# Altium PCB Mainboard BLE_cube.PcbDoc
Units mil, origin at the board's own origin, x right, y up, seen from the top; angles counter-clockwise.
Board outline 1968.5 x 1968.5 mil, 2 copper layers (Top Layer, Bottom Layer); 66 components, 119 nets, 314 pads, 270 vias.
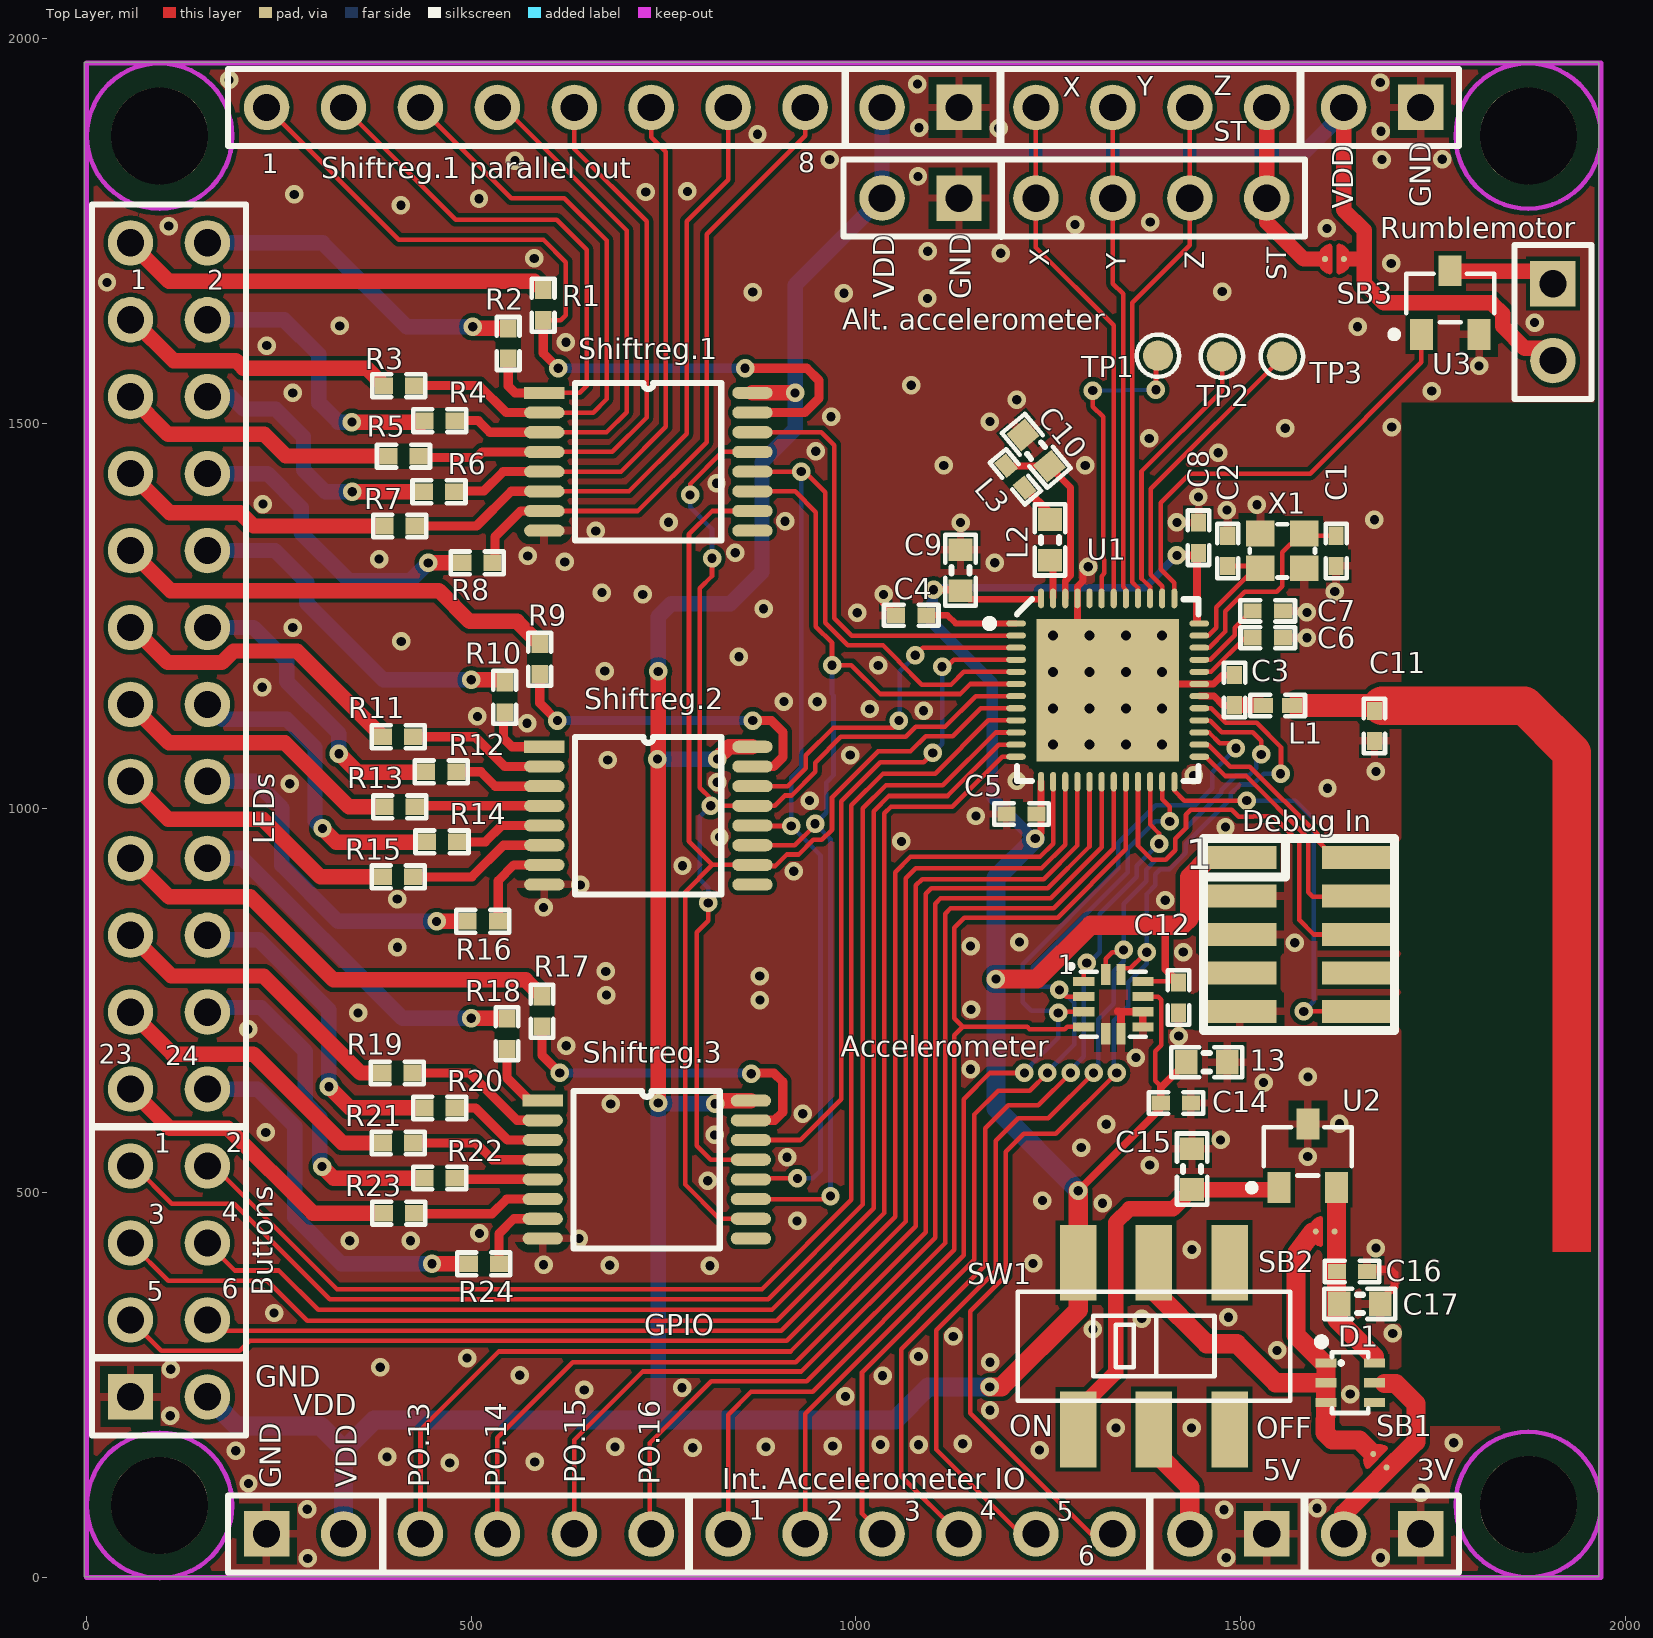
[diagram p0: Top Layer view]
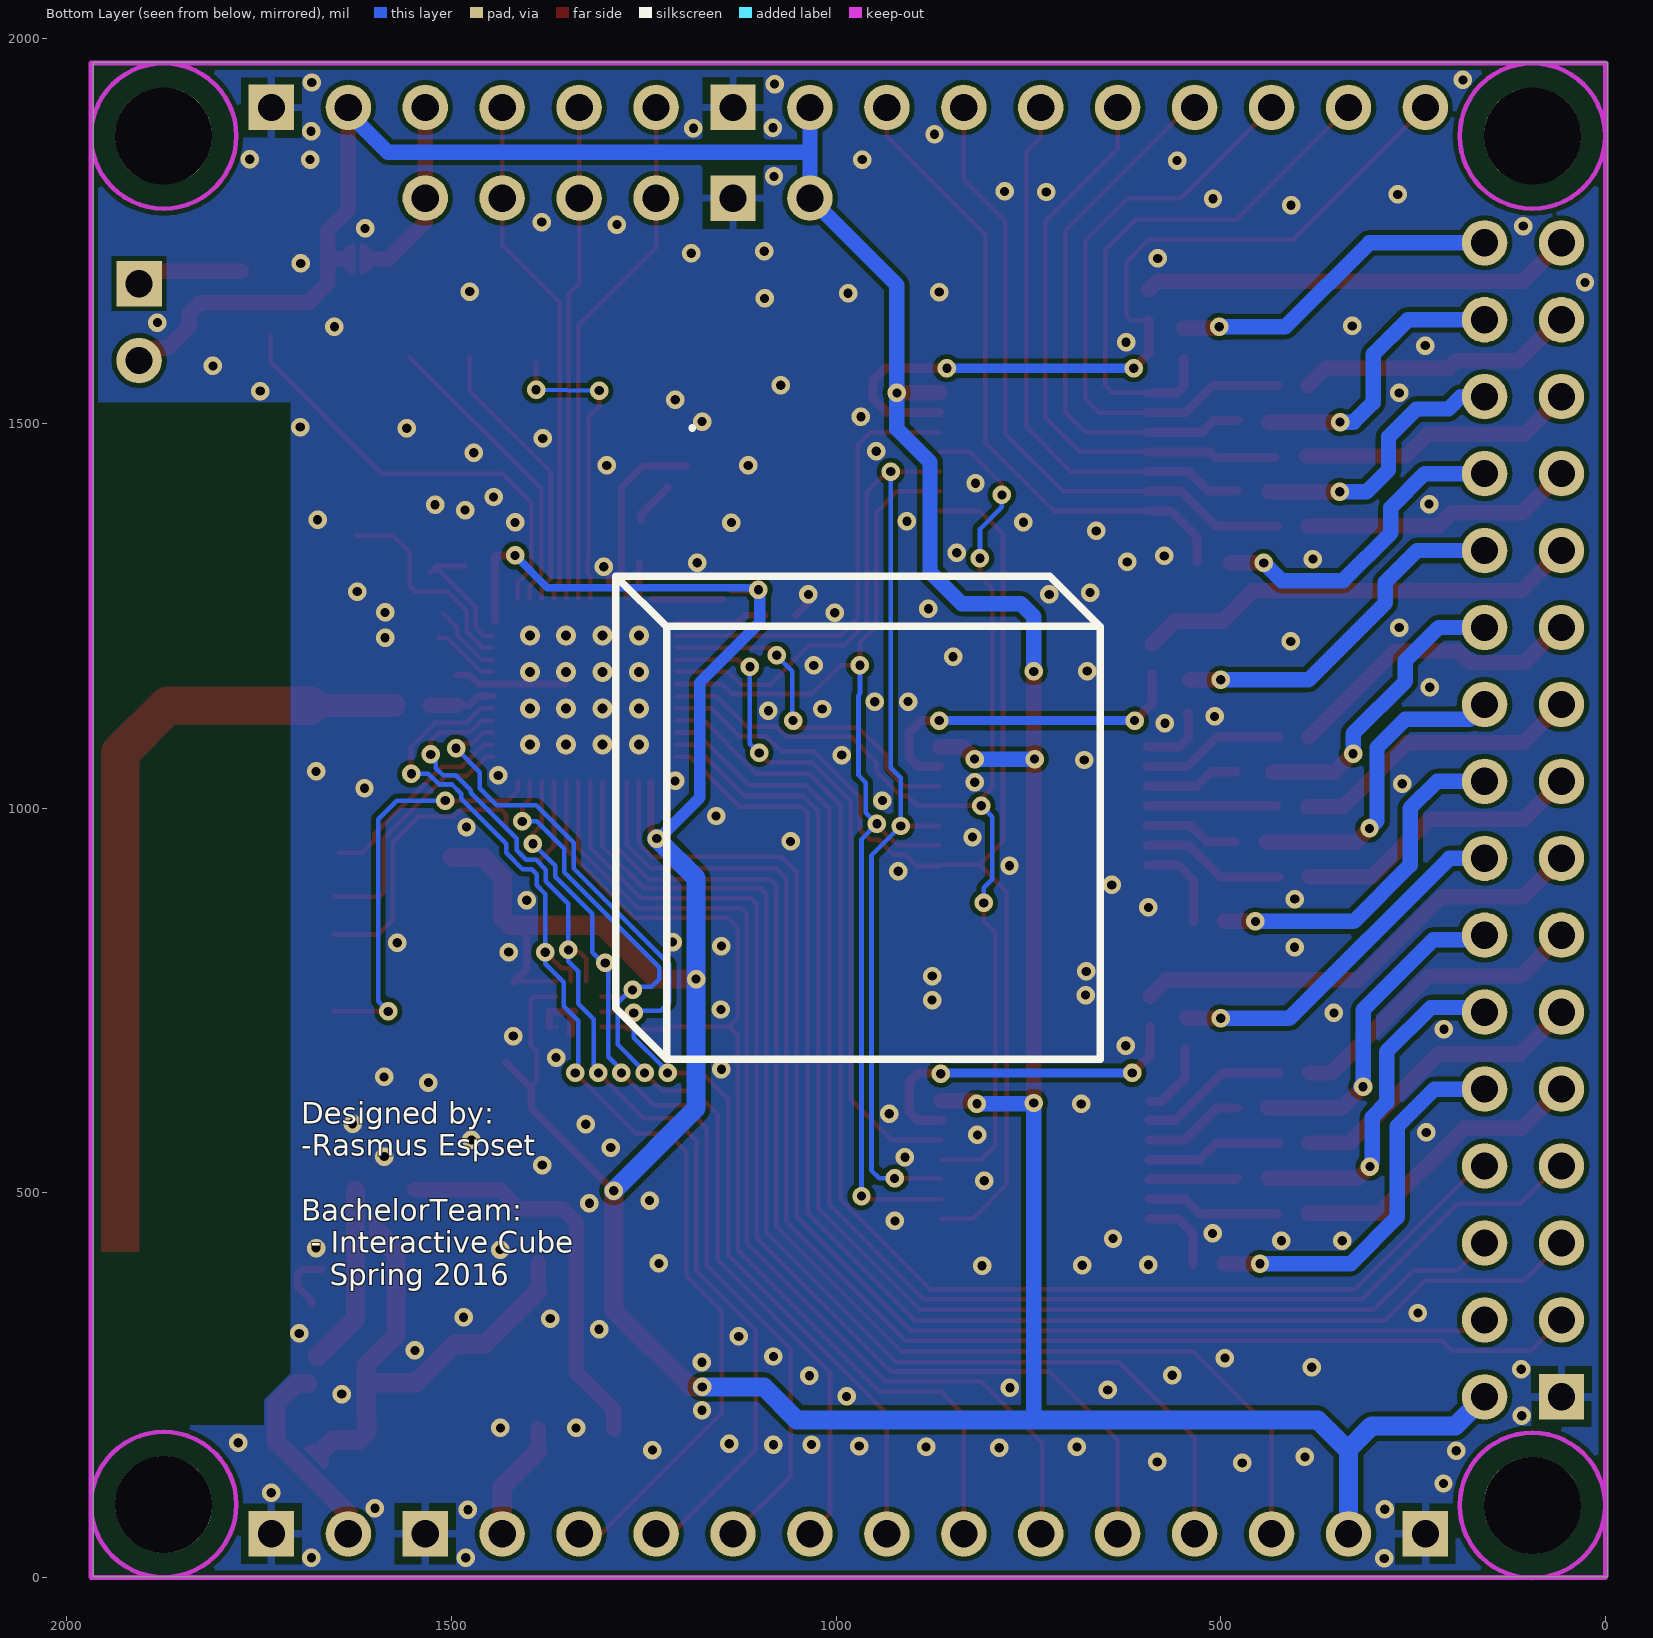
[diagram p1: Bottom Layer view, seen from below]
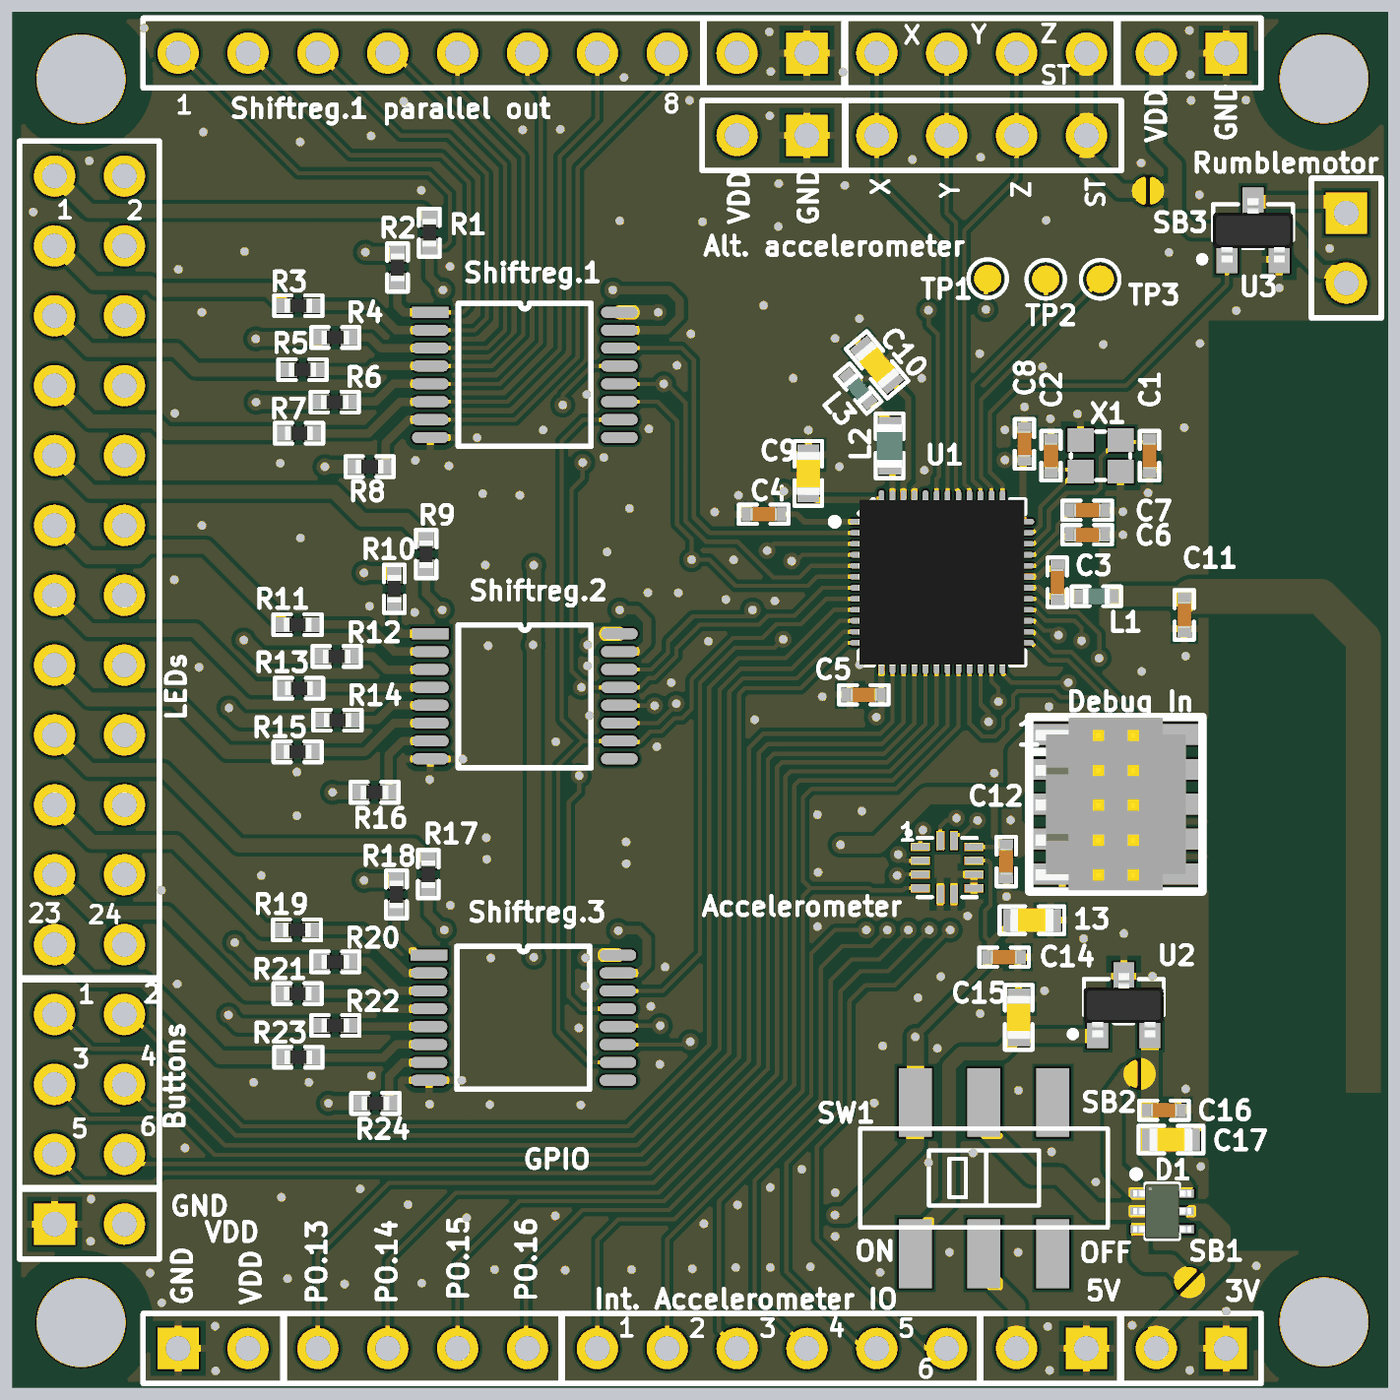
[diagram p2: 3D render of the assembled board from above, using the file's embedded part models]

## Layer stack, top to bottom
Top Solder: solder mask 0.4, Solder Resist, Dk 3.5
Top Layer: signal copper 1.4
Dielectric 1: dielectric 12.6, FR-4, Dk 4.8
Bottom Layer: signal copper 1.4
Bottom Solder: solder mask 0.4, Solder Resist, Dk 3.5

## Board outline
-3,1 1965.5,1 1965.5,1969.5 -3,1969.5

## Design rules (kind name [scope] priority, off if disabled: settings)
Clearance SB_Clearance [HasFootprint('Solderbridge')] p1: gap=5
Clearance [All] p2: gap=6
HoleSize [All] p1: absolutevalues=TRUE maxlimit=200 minlimit=1 maxpercent=80.000 minpercent=20.000
MinimumSolderMaskSliver [All] p1: minsoldermaskwidth=1
PolygonConnect [IsVia] p1: connectstyle=Direct reliefconductorwidth=10 reliefentries=4 polygonreliefangle="90 Angle" airgapwidth=10
PolygonConnect PolygonConnect_1 [All] p2: connectstyle=Relief reliefconductorwidth=10 reliefentries=4 polygonreliefangle="90 Angle" airgapwidth=10
RoutingVias [All] p1: holewidth=28 width=50 viastyle="Through Hole" minholewidth=12 minwidth=24 maxholewidth=28 maxwidth=50
SilkToSilkClearance [All] p1: silktosilkclearance=6
SolderMaskExpansion [All] p1: expansion=3
Width [All] p1: maxlimit=1000 minlimit=6 preferedwidth=10
27 further rules are at their usual default settings.

## Classes and differential pairs
component class Sheet2: * Accelerometer C1 C2 C3 C5 C6 C7 C8 C9 C10 C11 "Debug In" GPIO L1 L2 L3 LEDs P? R1 R2 R3 R4 R5 R6 R7 R8 R9 R10 R11 R12 R13 R14 R15 R16 R17 R18 R19 R20 R21 R22 R23 R24 R? Rumblemotor Shiftreg.1 skiftreg2 skiftreg3 U2 U3 VDD X1

## Components (designator, comment, footprint, x,y, rotation, side; value= is the part's Value field where it differs from the comment)
13 "10µF" CAPC1608X06L 1456,669.75 r0 top (schematic designator C13)
Accelerometer "LIS2DH12" LGA50P200X200X100-12N 1334.65,745.17 r0 top (schematic designator U4)
"Alt. accelerometer" "Comment" HDR1X6 1034,1792.86 r0 top (schematic designator P5)
C1 "12pF" CAPC1005X04L 1624.26,1334.41 r270 top
C2 "12pF" CAPC1005X04L 1483.26,1334.41 r90 top
C3 "0.8pF" CAPC1005X04L 1492.26,1153.41 r270 top
C4 "100nF" CAPC1005X04L 1072,1250.75 r180 top
C5 "100nF" CAPC1005X04L 1215.26,992.41 r180 top
C6 "N.C." CAPC1005X04L 1535.26,1221.41 r180 top
C7 "100pF" CAPC1005X04L 1535.26,1256.41 r0 top
C8 "100nF" CAPC1005X04L 1445.26,1351.41 r90 top
C9 "4.7µF" CAPC1608X06L 1136,1309.17 r90 top
C10 "1.0µF" CAPC1608X06L 1234.29,1464.61 r310 top
C11 "1pF" CAPC1005X04L 1674,1106.75 r90 top
C12 "100nF" CAPC1005X04L 1419.29,753.75 r90 top
C14 "100nF" CAPC1005X04L 1416,616.75 r180 top
C15 "1.0µF" CAPC1608X06L 1437,530.75 r90 top
C16 "100nF" CAPC1005X04L 1645,397.66 r180 top
C17 "1.0µF" CAPC1608X06L 1655,355.66 r180 top
D1 "SD103ATW-7-F" SOT-363 1611,278.75 r270 top
"Debug In" "FTSH-105" FTSH-105-K 1576,835.75 r270 top
GPIO "Header 16" HDR1X16#1 1734,56.75 r180 top (schematic designator P3)
L1 "3.9nH" INDC1005X04L 1548.26,1133.41 r0 top
L2 "10µH" INDC1608X06L 1252.26,1348.61 r270 top
L3 "15nH" INDC1005X04L 1207.29,1430.61 r310 top
LEDs "Header 16X2" HDR2X16 57.12,1734.8 r270 top (schematic designator P2)
R1 "N.C." RESC1005X04L 593.54,1653.75 r270 top
R2 "N.C." RESC1005X04L 548,1603.94 r270 top
R3 "N.C." RESC1005X04L 406,1549.21 r0 top
R4 "N.C." RESC1005X04L 459,1503.67 r0 top
R5 "N.C." RESC1005X04L 412,1457.59 r0 top
R6 "N.C." RESC1005X04L 458.12,1411.25 r0 top
R7 "N.C." RESC1005X04L 407,1366.67 r0 top
R8 "N.C." RESC1005X04L 508,1318.85 r0 top
R9 "N.C." RESC1005X04L 589,1193.75 r270 top
R10 "N.C." RESC1005X04L 543.46,1143.94 r270 top
R11 "N.C." RESC1005X04L 405,1092.75 r0 top
R12 "N.C." RESC1005X04L 461,1047.21 r0 top
R13 "N.C." RESC1005X04L 407,1001.67 r0 top
R14 "N.C." RESC1005X04L 462,956.14 r0 top
R15 "N.C." RESC1005X04L 405,910.6 r0 top
R16 "N.C." RESC1005X04L 515,852.75 r0 top
R17 "N.C." RESC1005X04L 592,735.75 r270 top
R18 "N.C." RESC1005X04L 546.46,706.75 r270 top
R19 "N.C." RESC1005X04L 404,655.75 r0 top
R20 "N.C." RESC1005X04L 459,610.21 r0 top
R21 "N.C." RESC1005X04L 405,564.67 r0 top
R22 "N.C." RESC1005X04L 459,519.14 r0 top
R23 "N.C." RESC1005X04L 406,473.6 r0 top
R24 "N.C." RESC1005X04L 516.36,407.65 r0 top
Rumblemotor "Header 2" HDR1X2 1906,1581.75 r90 top (schematic designator P4)
SB1 "Solderbridge" Solderbridge 1672.4,160.55 r315 top
SB2 "Solderbridge" Solderbridge 1622.32,449.79 r180 top
SB3 "Solderbridge" Solderbridge 1634.28,1713.71 r180 top
Shiftreg.1 "TSSOP16" SOP16 595,1539.75 r0 top (schematic designator Skiftreg.1)
Shiftreg.2 "TSSOP16" SOP16 595,1079.75 r0 top (schematic designator skiftreg.2)
Shiftreg.3 "TSSOP16" SOP16 593,619.75 r0 top (schematic designator shiftreg.3)
SW1 "Switch" JS202011SCQN 1387.36,300.75 r180 top
TP1 "Ø1.0mm,SMD" TP_SMD_Ø1.0mm 1392.7,1588.05 r0 top (schematic designator TP9)
TP2 "Ø1.0mm,SMD" TP_SMD_Ø1.0mm 1475.7,1587.05 r0 top (schematic designator TP9)
TP3 "Ø1.0mm,SMD" TP_SMD_Ø1.0mm 1553.7,1587.05 r0 top (schematic designator TP9)
U1 "nRF52832-QFAA" QFN40P600X600X90-48N 1327.26,1153.41 r0 top locked
U2 "AP7333-33SAG-7" SOT-23A 1550,506.75 r0 top
U3 "2N7000-Transistor" SOT-23A 1735,1615.75 r0 top
VDD "Header 16" HDR1X16#2 234,1910.75 r0 top (schematic designator P1)
X1 "32MHz" BT-XTAL_2016 1554.26,1334.41 r180 top

## Footprints (in the part's own frame and the unit in brackets; to place one, negate y for a bottom-side part, rotate by r counter-clockwise, add the part's x,y. Pads: shape width x height; smd on the part's side, far side on the other; paste and mask are expansions set on the pad)
BT-XTAL_2016 [mm] "Crystal 2.0 x 1.6 mm"
  rect 0.95x0.85 smd: 1(-0.725,-0.575) 2(0.725,-0.575) 3(0.725,0.575) 4(-0.725,0.575)
  silkscreen extent -1.08,-0.88 1.08,0.88
CAPC1005X04L [mm] "Chip Capacitor, 2-Leads, Body 1.0x0.5mm, IPC High Density"
  rect 0.6x0.5 smd: 1(-0.5,0) 2(0.5,0)
  silkscreen extent -0.9,-0.35 0.9,0.35, body extent -0.51,-0.25 0.51,0.25, height 0.5
CAPC1608X06L [mm] "Chip Capacitor, 2-Leads, Body 1.6x0.8mm, IPC High Density"
  rect 0.75x0.8 smd: 1(-0.675,0) 2(0.675,0)
  silkscreen extent -1.17,-0.5 1.17,0.5, body extent -0.8,-0.43 0.8,0.43, height 0.8
FTSH-105-K [mm]
  rect 0.76x2.4 smd: 1(-2.54,-1.95) 2(-2.54,1.95) 3(-1.27,-1.95) 4(-1.27,1.95) 5(0,-1.95) 6(0,1.95) 7(1.27,-1.95) 8(1.27,1.95) 9(2.54,-1.95) 10(2.54,1.95)
  silkscreen extent -3.18,-3.15 3.18,3.15, body extent -3.14,-2.92 3.14,2.92, height 5.71
HDR1X2 [mm] "Connector; Header; 2 Position"
  round 1.5 hole 0.9: 1(0,0)
  rect 1.5x1.5 hole 0.9: 2(2.54,0)
  silkscreen extent -1.27,-1.27 3.81,1.27
HDR1X6 [mm] "Connector; Header; 6 Position"
  round 1.5 hole 0.9: 1(0,0) 3(5.08,0) 4(7.62,0) 5(10.16,0) 6(12.7,0)
  rect 1.5x1.5 hole 0.9: 2(2.54,0)
  silkscreen extent -1.27,-1.27 13.97,1.27
HDR1X16#1 [mm] "Connector; Header; 16 Position"
  rect 1.5x1.5 hole 0.9: 1(0,0) 3(5.08,0) 16(38.1,0)
  round 1.5 hole 0.9: 2(2.54,0) 4(7.62,0) 5(10.16,0) 6(12.7,0) 7(15.24,0) 8(17.78,0) 9(20.32,0) 10(22.86,0) 11(25.4,0) 12(27.94,0) 13(30.48,0) 14(33.02,0) 15(35.56,0)
  silkscreen extent -1.27,-1.27 39.37,1.27
HDR1X16#2 [mm] "Connector; Header; 16 Position"
  round 1.5 hole 0.9: 1(0,0) 2(2.54,0) 3(5.08,0) 4(7.62,0) 5(10.16,0) 6(12.7,0) 7(15.24,0) 8(17.78,0) 9(20.32,0) 11(25.4,0) 12(27.94,0) 13(30.48,0) 14(33.02,0) 15(35.56,0)
  rect 1.5x1.5 hole 0.9: 10(22.86,0) 16(38.1,0)
  silkscreen extent -1.27,-1.27 39.37,1.27
HDR2X16 [mm] "Connector; Header; 16x2 Position"
  round 1.5 hole 0.9: 1(0,0) 2(0,2.54) 3(2.54,0) 4(2.54,2.54) 5(5.08,0) 6(5.08,2.54) 7(7.62,0) 8(7.62,2.54) 9(10.16,0) 10(10.16,2.54) 11(12.7,0) 12(12.7,2.54) 13(15.24,0) 14(15.24,2.54) 15(17.78,0) 16(17.78,2.54) 17(20.32,0) 18(20.32,2.54) 19(22.86,0) 20(22.86,2.54) 21(25.4,0) 22(25.4,2.54) 23(27.94,0) 24(27.94,2.54) 25(30.48,0) 26(30.48,2.54) 27(33.02,0) 28(33.02,2.54) 29(35.56,0) 30(35.56,2.54) 32(38.1,2.54)
  rect 1.5x1.5 hole 0.9: 31(38.1,0)
  silkscreen extent -1.27,-1.27 39.37,3.81
INDC1005X04L [mm] "Chip Inductor, 2-Leads, Body 1.0x0.5mm, IPC High Density"
  rect 0.65x0.5 smd: 1(-0.475,0) 2(0.475,0)
  silkscreen extent -0.9,-0.35 0.9,0.35, body extent -0.5,-0.3 0.5,0.3, height 0.5
INDC1608X06L [mm] "Chip Inductor, 2-Leads, Body 1.6x0.8mm, IPC High Density"
  rect 0.75x0.8 smd: 1(-0.675,0) 2(0.675,0)
  silkscreen extent -1.18,-0.5 1.17,0.5, body extent -0.8,-0.48 0.8,0.48, height 0.8
JS202011SCQN [mm]
  rect 1.2x2.5 smd: 1(-2.5,-2.75) 2(0,-2.75) 3(2.5,-2.75) 4(-2.5,2.75) 5(0,2.75) 6(2.5,2.75)
  silkscreen extent -4.5,-1.8 4.5,1.8, body extent -4.52,-3.75 4.52,3.75, height 5.5
LGA50P200X200X100-12N [mm] "LGA, 12-Leads, Body 2.00x2.00mm, Pitch 0.50mm, IPC Medium Density"
  rect 0.7x0.3 smd paste-0.025 mask+0.05: 1(-0.975,0.75) 2(-0.975,0.25) 3(-0.975,-0.25) 4(-0.975,-0.75) 7(0.975,-0.75) 8(0.975,-0.25) 9(0.975,0.25) 10(0.975,0.75)
  rect 0.3x0.7 smd paste-0.025 mask+0.05: 5(-0.25,-0.975) 6(0.25,-0.975) 11(0.25,0.975) 12(-0.25,0.975)
  silkscreen extent -1.45,-1.07 1.08,1.3, body extent -1,-1 1,1, height 1.01
QFN40P600X600X90-48N [mm] "QFN, 48-Leads, Body 6,0x6,0mm (max), Pitch 0,40mm, IPC Medium Density"
  oval 0.65x0.2 smd: 1(-3.025,2.2) 2(-3.025,1.8) 3(-3.025,1.4) 4(-3.025,1) 5(-3.025,0.6) 6(-3.025,0.2) 7(-3.025,-0.2) 8(-3.025,-0.6) 9(-3.025,-1) 10(-3.025,-1.4) 11(-3.025,-1.8) 12(-3.025,-2.2) 25(3.025,-2.2) 26(3.025,-1.8) 27(3.025,-1.4) 28(3.025,-1) 29(3.025,-0.6) 30(3.025,-0.2) 31(3.025,0.2) 32(3.025,0.6) 33(3.025,1) 34(3.025,1.4) 35(3.025,1.8) 36(3.025,2.2)
  oval 0.2x0.65 smd: 13(-2.2,-3.025) 14(-1.8,-3.025) 15(-1.4,-3.025) 16(-1,-3.025) 17(-0.6,-3.025) 18(-0.2,-3.025) 19(0.2,-3.025) 20(0.6,-3.025) 21(1,-3.025) 22(1.4,-3.025) 23(1.8,-3.025) 24(2.2,-3.025) 37(2.2,3.025) 38(1.8,3.025) 39(1.4,3.025) 40(1,3.025) 41(0.6,3.025) 42(0.2,3.025) 43(-0.2,3.025) 44(-0.6,3.025) 45(-1,3.025) 46(-1.4,3.025) 47(-1.8,3.025) 48(-2.2,3.025)
  rect 4.7x4.7 smd: 49(0,0)
  silkscreen extent -4.02,-3 3,3, body extent -3.02,-3.02 3.02,3.02, height 0.86
RESC1005X04L [mm]
  rect 0.6x0.55 smd: 1(-0.5,0) 2(0.5,0)
  silkscreen extent -0.87,-0.38 0.88,0.38, body extent -0.5,-0.25 0.5,0.25, height 0.3
Solderbridge [mm]
  round 0.2 smd paste-10: 1(0,0) 2(0.625,0)
  Top Layer region: 0.236,-0.432 0.16,-0.505 0.042,-0.467 -0.023,-0.424 -0.097,-0.351 -0.15,-0.292 -0.208,-0.193 -0.236,-0.099 -0.231,0.122 -0.206,0.193 -0.122,0.33 -0.038,0.411 0.054,0.469 0.155,0.5 0.206,0.483 0.236,0.43
  Top Layer region: 0.389,0.432 0.465,0.505 0.583,0.467 0.648,0.424 0.721,0.351 0.775,0.292 0.833,0.193 0.861,0.099 0.856,-0.122 0.831,-0.193 0.747,-0.33 0.663,-0.411 0.571,-0.469 0.47,-0.5 0.419,-0.483 0.389,-0.43
  Top Layer lines w0.152: 0.159,-0.431 cw(c0.27,0) 0.159,0.431 ; 0.465,-0.431 ccw(c0.355,0) 0.465,0.431
SOP16 [mm]
  rect 1.33x0.4 smd: 1(0,0)
  oval 1.33x0.4 smd: 2(0,-0.65) 3(0,-1.3) 4(0,-1.95) 5(0,-2.6) 6(0,-3.25) 7(0,-3.9) 8(0,-4.55) 9(6.87,-4.55) 10(6.87,-3.9) 11(6.87,-3.25) 12(6.87,-2.6) 13(6.87,-1.95) 14(6.87,-1.3) 15(6.87,-0.65) 16(6.87,0)
  silkscreen extent 1.02,-4.88 5.84,0.33, body extent 0.92,-4.98 5.94,0.43, height 1.3
SOT-23A [mil] "SOT-23 footprint"
  rect 30x40 smd: 1(0,0) 2(74.8,0) 3(37.4,82.68)
  silkscreen extent -39,-4 94,79, body extent -20,-5 95,87, height 39
SOT-363 [mm] "SOT-363 (SC88)"
  rect 0.3x0.7 smd: 1(0,0) 2(0.65,0) 3(1.3,0) 4(1.3,1.6) 5(0.65,1.6) 6(0,1.6)
  silkscreen extent -0.82,-0.27 1.65,1.4, body extent -0.35,-0.25 1.65,1.85, height 0.93
TP_SMD_Ø1.0mm [mm]
  round 1 smd paste-5: 1(0,0)
  silkscreen extent -0.7,-0.7 0.7,0.7

## Part data
13: library part C0603-10µ, "Capacitor, X5R, ±20%"
"Alt. accelerometer": library part "Header 6"
C1 C2: library part C0402-12p, "Capacitor, NP0, ±2%"
C3: library part C0402-0.8p, "Capacitor, NP0, ±5%"
C4 C5 C8 C12 C14 C16: library part C0402-100n, "Capacitor, X7R, ±10%"
C6: library part C0402-N.C., "Not mounted"
C7: library part C0402-100p, "Capacitor, NP0, ±5%"
C9: library part C0603-4µ7, "Capacitor, X5R, ±10%"
C10 C15 C17: library part C0603-1µ0, "Capacitor, X7R, ±10%"
C11: "Capacitor, NP0, ±0.1pF"
D1: "Surface Mount Schottky Barrier Diode Array"
"Debug In": library part FTSH-105-01-F-DV-K, "SAMTEC - CONN HEADER 10POS DUAL .05\" SMD KEYING SHROUD"
GPIO VDD: "Header, 16-Pin"
L1: library part L0402-3n9, "High frequency chip inductor ±5%"
L2: library part L0603-10µ, "Chip inductor, IDC,min = 50 mA, ±20%"
L3: library part L0402-15n, "High frequency chip inductor ±10%"
LEDs: "Header, 16-Pin, Dual row"
R1 R2 R3 R4 R5 R6 R7 R8 R9 R10 R11 R12 R13 R14 R15 R16 R17 R18 R19 R20 R21 R22 R23 R24: library part RES_0402, "Not mounted"
Rumblemotor: "Header, 2-Pin"
Shiftreg.1 Shiftreg.2 Shiftreg.3: "Shiftregister, 74HC595"
SW1: library part SW-DPDT, "SMD slide Switch (ON-ON)"
TP1 TP2 TP3: library part TP_SMD_Ø1.0MM, "1.0mm circular SMD testpad"
U1: "Multi-protocol Bluetooth Low Energy and 2.4GHz proprietary system-on-chip"
U2: "300mA, Low Quiescent Current, Fast Transient Low Dropout Linear Regulator"
X1: library part XTAL_SMD2016_32MHz_8pF_Epson, "XTAL SMD 2016, 32MHz, Cl=8pF, Total Tol: ±40ppm"

## Free pads (board coordinates)
  round 126 hole 126: 1(95,93.75) 1(95,1873.75) 1(1874,94.75) 1(1874,1873.75)

## Via types
v1: diameter 24, hole 12, Top Layer to Bottom Layer, tented both sides, 254 vias
v2: diameter 25.98, hole 12.99, Top Layer to Bottom Layer, tented both sides, 16 vias

## Nets (pads, with @x,y where several pads share a name; then routed paths per layer and width w, separated by ;. In a path a pad name is that pad's centre, name@x,y a point inside that pad or via, vN(x,y) a via of type N, cw(c..) or ccw(c..) an arc to the next point about the centre after c; other vN are vias at no path point)
3VExt: D1.5 GPIO.2 SB1.2 | length 258.7
  Top Layer w25: GPIO.2 1634,82.75 1727.6,176.35 ; D1.5@1687.52,251.97 1701.77,251.97 1728,225.75 1728,176.75
3VInt: D1.1 D1.2 D1.3 SB1.1 SB2.2 SW1.2 | length 707.4
  Top Layer w12: D1.3 1611,235.75
  Top Layer w20: SW1.2@1387.36,372.38 SW1.2
  Top Layer w25: SW1.2@1387.36,372.38 1456,303.75 1495,303.75 1545.59,253.16 D1.2 ; 1572,398.75 1572,419.75 ; 1593.66,449.17 1572,419.75 ; 1611,235.75 D1.2 ; 1667.3,165.65 1654.21,178.75 1619,178.75 1610,187.75 1610.61,227.57 D1.2 ; 1572,419.75 1572,314.75 1611,275.75 D1.2
5V->3V: C16.2 C17.2 D1.6 SB2.1 U2.2 | length 236.3
  Top Layer w25: U2.2@1624.8,502.75 1624.8,335.95 1673.97,286.78
5VExt: GPIO.4 SW1.5 | length 155
  Top Layer w20: SW1.5@1387.36,164.38 SW1.5
  Top Layer w25: SW1.5@1387.36,164.38 1434,117.75 GPIO.4
5VInt: C15.1 SW1.6 U2.1 | length 516.7
  Top Layer w20: SW1.6 1288.94,217.69 1337.6,266.35 1337.6,461.35 1355.33,479.08 1412.19,479.08 C15.1 U2.1@1547.43,504.17
"Aks. CS": Accelerometer.2 GPIO.8 U1.23 | length 1301.8
  Top Layer w6: GPIO.8 1008,82.75 1008,266.75 1154,412.75 1154,601.75 1185,632.75 1226,632.75 v1(1249,655.75) v1@1249,646.75 ; v1(1264.6,763.75) 1273.33,755.02 Accelerometer.2 ; Accelerometer.2@1296.58,755.06 Accelerometer.2@1305,755.06 ; U1.23 1398.13,1011.62 1408,1001.75 v1(1408,982.75)
  Bottom Layer w6: v1@1256,664.75 1284,692.75 1284,747.05 v1@1263.3,767.75 ; v1@1272.6,767.75 v1@1263.3,767.75 ; v1(1408,982.75) 1389,982.75 1353.2,946.95 1353.2,916.55 1229.99,793.33 1229.99,777.76 1240,767.75 v1@1263.3,767.75
"Aks. INT1": Accelerometer.12 GPIO.6 U1.28 | length 1450.9
  Top Layer w6: GPIO.6 1214,56.75 1104.4,166.35 1104.4,321.15 1182,398.75 1182,567.75 1211,596.75 1250,596.75 v1(1309,655.75) v1@1308.7,655.75 ; Accelerometer.12 1324.81,804.33 1333.22,812.75 v1@1348,812.75 ; Accelerometer.12@1325,774.75 Accelerometer.12@1325,783.56 ; U1.28@1446.35,1113.51 1460.74,1113.51 1475.5,1098.75 1516,1098.75 1527,1087.75 v1(1527,1069.75)
  Bottom Layer w6: v1@1315,661.75 1315,725.75 1335,745.75 1335,787.75 1348,800.75 v1(1348,815.75) 1348,875.75 1377.2,904.95 1377.2,919.98 1389.97,932.75 1402.7,932.75 1415,945.05 1415,960.05 1475,1020.05 1475,1023.42 1494.33,1042.75 1511,1042.75 1520.15,1051.9 1520.15,1062.9 v1(1527,1069.75)
"Aks. INT2": Accelerometer.11 GPIO.5 U1.29 | length 1527.5
  Top Layer w6: GPIO.5 1305,56.75 1148.4,213.35 1148.4,346.15 1194.7,392.45 1194.7,553.45 1218,576.75 1260,576.75 v1(1339,655.75) ; Accelerometer.11@1344.68,774.75 1344.68,788.43 1348,791.75 1356.7,791.75 1373.43,808.48 1378,808.48 v1(1378,812.55) ; U1.29 1461.96,1129.79 1473.42,1118.33 ; 1473.42,1118.19 1480.85,1110.75 1520.97,1110.75 1552.5,1079.22 v1@1552.5,1044.75
  Bottom Layer w6: v1(1339,655.75) 1335,659.75 1335,723.75 1354,742.75 1354,773.75 1378,797.75 v1(1378,812.55) 1378,888.35 1389.2,899.55 1389.2,914.25 1395.7,920.75 1407.67,920.75 1428.7,941.78 1428.7,953.75 1487,1012.05 1487,1018.45 1499.3,1030.75 1515.97,1030.75 1529.97,1044.75 v1(1552,1044.75)
"Aks. SCL/SPC": Accelerometer.1 GPIO.7 U1.22 | length 1179.5
  Top Layer w6: GPIO.7 1059,131.75 1059,296.75 1168,405.75 1168,583.75 1198,613.75 1237,613.75 v1(1279,655.75) ; Accelerometer.1 1296.26,792.01 v1@1301.5,797.25 ; U1.22 1382.38,978.67 1394,967.05 v1(1394,953.75)
  Bottom Layer w6: v1@1285,665.78 1296,676.78 v1@1296,791.75 ; v1@1301.5,797.25 1317,812.75 1317,862.55 1365.2,910.75 1365.2,924.95 v1(1394,953.75)
  other v1: 1300,798.75
"Aks. SDA/SDI/SDO": Accelerometer.4 GPIO.10 U1.20 | length 1487
  Top Layer w6: GPIO.10 834,211.75 863.7,241.45 943.67,241.45 1128,425.78 1128,704.75 1138.94,715.69 ; Accelerometer.4@1305,715.69 1274.64,715.69 1271.7,712.75 1225.59,712.75 1222.65,715.69 1138.94,715.69 ; U1.20 1350.88,946.51 1262.12,857.75 1141,857.75 1128,844.75 1128,726.64 1138.94,715.69
"Aks. SDO/SA0": Accelerometer.3 GPIO.9 U1.27 | length 1459.5
  Top Layer w6: GPIO.9 934,212.75 1140,418.75 1140,621.75 1174,655.75 v1(1219,655.75) v1@1217,653.75 ; v1(1263,733.75) 1264.58,735.33 Accelerometer.3 Accelerometer.3@1305,735.38 ; U1.27 1458.98,1098.29 1473.04,1084.23 1487.51,1084.23 v1(1494,1077.75)
  Bottom Layer w6: v1@1227,663.75 1227,665.75 1263,701.75 v1(1263,733.75) 1263,737.75 1262,736.75 1228,736.75 1217,747.75 1217,797.32 1341.2,921.52 1341.2,954.95 1390,1003.75 1441,1003.75 1463,1025.75 1463,1046.75 v1(1494,1077.75)
"Alt.Aks.Selftest (ST)": "Alt. accelerometer.6" SB3.2 VDD.14 | length 242.5
  Top Layer w20: VDD.14 1534,1792.86 1534,1761.67 1581.96,1713.71 SB3.2@1607.6,1713.71
Alt.Aks.X: "Alt. accelerometer.3" U1.42 VDD.11 | length 680.1
  Top Layer w6: VDD.11 1234,1792.86 1234,1728.75 1335.13,1627.61 1335.13,1405.56 U1.42
Alt.Aks.Y: "Alt. accelerometer.4" U1.41 VDD.12 | length 645.2
  Top Layer w6: VDD.12 1334,1792.86 1334,1681.75 1347.26,1668.49 1347.26,1287.5 1350.88,1283.91 U1.41
Alt.Aks.Z: "Alt. accelerometer.5" U1.40 VDD.13 | length 672.3
  Top Layer w6: U1.40 1366.63,1286.18 1359.26,1293.55 1359.26,1657.01 1434,1731.75 1434,1792.86 VDD.13
DEC1: 
DEC2: C6.2 U1.32 | length 88.3
  Top Layer w6: U1.32 1461.55,1177.03 1505.93,1221.41 C6.2@1516.26,1221.41
DEC3: C7.1 U1.33 | length 96
  Top Layer w6: U1.33 1460.33,1192.78 1492.26,1224.71 1492.26,1234.6 C7.1@1511.32,1253.66
DEC4: C10.2 L3.1 U1.46 | length 240.2
  Top Layer w9: L3.1 C10.2@1250.69,1444.94 ; C10.2 1279,1416.62 1279,1302.42 1272.14,1295.56 U1.46@1272.14,1273.71
GND: 13.2 "Alt. accelerometer.2" "Debug In.3" "Debug In.5" "Debug In.9" Accelerometer.5 Accelerometer.6 Accelerometer.7 Accelerometer.8 C1.2 C2.2 C3.1 C4.2 C5.2 C6.1 C7.2 C8.2 C9.2 C10.1 C11.1 C12.1 C14.1 C15.2 C16.1 C17.1 GPIO.1 GPIO.3 GPIO.16 LEDs.31 Shiftreg.1.8 Shiftreg.2.8 Shiftreg.3.8 U1.31 U1.45 U1.49 U2.3 U3.2 VDD.10 VDD.16 X1.2 X1.4 | length 418.7
  Top Layer w6: Accelerometer.7@1363.97,715.61 Accelerometer.7@1364.05,715.69 ; v1@1364,684.75 v1@1364.05,684.8
  Top Layer w9: U1.49@1287.89,1240.02 U1.45 1287.89,1288.04 1295.26,1295.41 v1@1295.26,1312.41 ; U1.49@1351.57,1161.41 1465.02,1161.41 1476.32,1172.71 C3.1@1492.57,1172.71
  Top Layer w10: v1(1036,1277.75) 1036,1267.07 C4.2 ; 1340.65,736.17 1341.49,735.33 ; Accelerometer.6 1344.49,732.33 1341.49,735.33 ; Accelerometer.7 Accelerometer.8 1341.49,735.33 ; C16.1@1667.78,400.75 1694,400.75 1700,394.75 1700,377.75 1681.57,359.32 C17.1
  other v1: 287.6,24.75 1481.4,25.55 1681.9,25.55 1478.6,88.15 286.9,88.75 1599.4,89.85 1734.1,110.25 210.5,122.15 472.2,148.95 582.6,150.25 390.6,156.75 193.9,164.75 1238.7,165.65 788,168.75 687,169.75 883,169.75 970,170.75 1032,172.75 1081.5,172.65 1139,173.75 1777.1,175.05 1436.3,194.35 1338,194.45 108.7,210.25 1174.3,217.25 986.4,235.35 1642.6,238.45 647,243.75 774,246.55 1034.7,262.25 563,262.75 109.4,270.65 381.7,273.15 1174.4,279.75 494.6,285.15 1081.5,287.25 1547.4,295.15 1126.6,313.25 1697.7,317.25 1308.1,322.75 1371.6,336.45 1484.2,338.15 243.8,343.75 810.3,405.25 680,405.75 594,406.45 1230.3,408.15 1436.8,426.15 1676,428.15 342.2,437.65 421.2,437.65 640.1,440.55 510.7,447.25 923.5,463.45 1320.6,486.45 1242.4,489.85 807.3,515.55 1381.8,536.05 910.6,546.35 1587.3,547.05 1292.9,558.75 1474,568.75 816.3,575.25 232.8,578.45 1325.5,589.05 1628.5,589.65 931,602.75 681.5,615.55 1529.9,643.35 1587.6,650.65 1149.1,660.55 1364,675.75 623.6,691.15 1419.7,703.65 210,712.65 353,733.75 1149.7,738.25 875.3,750.55 675.7,756.95 875,781.75 675,787.75 1425.5,812.95 404.1,819.25 1149,820.75 1570.4,825.15 1212.6,825.85 594,870.95 1402,880.25 404,881.75 641.6,900.15 919.1,918.05 774.6,925.15 1059.2,956.75 822.7,962.45 1480.4,975.35 1156,989.75 939.8,1009.75 1613,1025.75 264,1031.75 819.8,1033.75 1209.26,1035.3 1439,1042.55 1676,1047.75 677.6,1062.55 992.8,1068.95 572.6,1110.25 508,1119.15 1087.9,1126.65 1018,1128.85 949.9,1138.15 906.4,1138.55 228.5,1157.05 673.7,1178.15 1029,1185.55 848,1196.75 409,1216.75 1586.26,1221.41 268,1234.75 1001.8,1253.85 1586.26,1254.41 880,1259.05 723.1,1277.75 669.9,1280.25 1622.26,1281.41 1302,1313.75 1180.4,1318.95 621.6,1319.95 380.2,1323.75 573.6,1327.85 843.3,1331.95 661.9,1360.35 1136,1371.17 756.5,1371.45 1417.26,1371.41 907.9,1372.85 1674,1374.75 1482.26,1387.41 229.3,1395.25 1521.26,1394.41 1445.26,1404.41 818.8,1422.25 1114.26,1445.41 1298.26,1445.41 1471.1,1461.85 947.9,1463.85 1381.2,1480.55 1558,1493.75 1696.4,1495.25 1174.26,1502.41 967.8,1508.75 1209,1530.75 267.9,1539.75 1748.5,1542.15 1071.9,1549.65 1810,1574.75 234.3,1601.25 623.1,1605.45 1652.1,1625.55 329,1626.75 1882.1,1631.15 1093,1662.55 984.5,1669.25 866,1670.75 1476.3,1671.35 26.6,1683.35 1695.8,1707.95 582,1714.45 1188.2,1721.35 1093.5,1723.95 1612.3,1753.55 106.9,1756.55 1284.9,1758.45 1382.5,1761.75 408.6,1783.55 510.1,1792.15 270,1797.75 727,1800.85 781,1801.55 1080.7,1821.05 556.8,1841.75 965.9,1843.05 1683.7,1843.05 1762.1,1843.55 872.1,1875.95 1682.4,1879.95 1082.1,1884.35 1185.5,1883.65 1080,1941.15 1681.5,1943.15 185.2,1946.55
  other v2: 1256.39,1082.54 1303.64,1082.54 1350.88,1082.54 1398.13,1082.54 1256.39,1129.79 1303.64,1129.79 1350.88,1129.79 1398.13,1129.79 1256.39,1177.03 1303.64,1177.03 1350.88,1177.03 1398.13,1177.03 1256.39,1224.28 1303.64,1224.28 1350.88,1224.28 1398.13,1224.28
Net*_3: 
Net*_11: 
Net*_12: 
NetBT?_1: 
NetBT?_2: 
NetC3_2: C3.2 L1.1 U1.30 | length 86.6
  Top Layer w9: U1.30 1465.3,1145.54 1477.5,1133.34 C3.2@1492.57,1133.34
  Top Layer w20: C3.2@1492.26,1133.54 L1.1@1527.57,1133.54
NetC4_1: C4.1 U1.1 | length 120.9
  Top Layer w8: C4.1 1119,1250.75 1129.72,1240.02 U1.1
NetC13_2: C11.2 L1.2 | length 994.1
  Top Layer w30: L1.2@1575,1133.66 C11.2@1674,1133.66
  Top Layer w50: 1684.38,1133.32 1868.98,1133.32 1930.38,1071.93 1930.38,448.25
NetL2_1: L2.1 L3.2 | length 55.2
  Top Layer w11: L3.2 1253.26,1382.33 L2.1@1253.26,1375.19
NetL2_2: L2.2 U1.47 | length 45.2
  Top Layer w9: U1.47@1256.39,1273.71 L2.2@1256.39,1318.9
NetP2_1: LEDs.1 R1.1 | length 561.8
  Top Layer w20: LEDs.1 107.17,1684.75 582.22,1684.75 R1.1
NetP2_2: LEDs.2 R2.1 | length 436.9
  Top Layer w20: v1(502,1625.75) 504.12,1623.62 R2.1
  Bottom Layer w20: LEDs.2 306.95,1734.8 416,1625.75 v1(502,1625.75)
NetP2_3: LEDs.3 R3.1 | length 364.7
  Top Layer w12: LEDs.3 LEDs.3@59.95,1634.8
  Top Layer w20: LEDs.3@59.95,1634.8 113,1581.75 194,1581.75 203.9,1571.85 363.68,1571.85 R3.1
NetP2_4: LEDs.4 R4.1 | length 372.1
  Top Layer w20: v1(345,1501.75) R4.1@437.39,1501.75
  Bottom Layer w20: LEDs.4 256.95,1634.8 302,1589.75 302,1527.05 327.3,1501.75 v1(345,1501.75)
NetP2_5: LEDs.5 R5.1 | length 363.4
  Top Layer w20: LEDs.5 106.17,1485.75 231,1485.75 259,1457.75 R5.1@388.63,1457.75
NetP2_6: LEDs.6 R6.1 | length 356.6
  Top Layer w20: v1(345.5,1411.15) R6.1@437.35,1411.15
  Bottom Layer w20: LEDs.6 187.95,1534.8 204,1518.75 245.9,1518.75 282,1482.65 282,1439.75 310.6,1411.15 v1(345.5,1411.15)
NetP2_7: LEDs.7 R7.1 | length 358.4
  Top Layer w20: LEDs.7 108.17,1383.75 200,1383.75 217.08,1366.67 R7.1
NetP2_8: LEDs.8 R8.1 | length 416.7
  Top Layer w20: v1(444,1318.75) R8.1@487.31,1318.75
  Bottom Layer w20: LEDs.8 234.95,1434.8 279,1390.75 279,1357.75 341,1295.75 421,1295.75 v1(444,1318.75)
NetP2_9: LEDs.9 R9.1 | length 582.2
  Top Layer w20: LEDs.9 109.17,1282.75 458,1282.75 498,1242.75 559.68,1242.75 R9.1
NetP2_10: LEDs.10 R10.1 | length 468.6
  Top Layer w20: v1(500,1166.75) R10.1@540.34,1166.75
  Bottom Layer w20: LEDs.10 244.95,1334.8 286,1293.75 286,1266.75 386,1166.75 v1(500,1166.75)
NetP2_11: LEDs.11 R11.1 | length 399.4
  Top Layer w20: LEDs.11 59.95,1234.8 105.47,1189.27 175.97,1189.27 190.95,1204.25 273.81,1204.25 R11.1
NetP2_12: LEDs.12 R12.1 | length 384.6
  Top Layer w20: v1(328,1070.75) 352,1046.75 R12.1@432.78,1046.75
  Bottom Layer w20: LEDs.12 216.95,1234.8 260,1191.75 260,1164.75 328,1096.75 v1(328,1070.75)
NetP2_13: LEDs.13 R13.1 | length 385.3
  Top Layer w20: LEDs.13 107.17,1084.75 258,1084.75 341.08,1001.67 R13.1
NetP2_14: LEDs.14 R14.1 | length 413.7
  Top Layer w20: v1(306.7,973.55) 324.5,955.75 R14.1@440.7,955.75
  Bottom Layer w20: LEDs.14 176.37,1115.55 260.2,1115.55 297,1078.75 297,983.25 v1(306.7,973.55)
NetP2_15: LEDs.15 R15.1 | length 379.6
  Top Layer w20: LEDs.15 106.17,985.75 229,985.75 304.15,910.6 R15.1
NetP2_16: LEDs.16 R16.1 | length 457
  Top Layer w20: v1(455,852.75) R16.1
  Bottom Layer w20: LEDs.16 218.95,1034.8 253.76,999.99 253.76,925.99 327,852.75 v1(455,852.75)
NetP2_17: LEDs.17 R17.1 | length 609.2
  Top Layer w20: LEDs.17 107.17,884.75 213,884.75 321,776.75 570.68,776.75 R17.1
NetP2_18: LEDs.18 R18.1 | length 473.2
  Top Layer w20: v1(500,726.75) R18.1@544.15,726.75
  Bottom Layer w20: LEDs.18 202.95,934.8 411,726.75 v1(500,726.75)
NetP2_19: LEDs.19 R19.1 | length 401.4
  Top Layer w20: LEDs.19 110.17,781.75 230.1,781.75 356.1,655.75 R19.1
NetP2_20: LEDs.20 R20.1 | length 437.3
  Top Layer w20: v1(315,637.75) 342,610.75 R20.1@438.78,610.75
  Bottom Layer w20: LEDs.20 163.17,828.75 224,828.75 315,737.75 315,640.75 318,637.75 v1(315,637.75)
NetP2_21: LEDs.21 R21.1 | length 398.7
  Top Layer w20: LEDs.21 111.59,680.33 216.82,680.33 332.48,564.67 R21.1
NetP2_22: LEDs.22 R22.1 | length 449.2
  Top Layer w20: v1(306.1,534.05) 321.4,518.75 R22.1@437.7,518.75
  Bottom Layer w20: LEDs.22 163.16,740.85 227,740.85 284.3,683.55 284.3,617.15 302.9,598.55 302.9,541.25 v1(306.1,534.05)
NetP2_23: LEDs.23 R23.1 | length 396
  Top Layer w20: LEDs.23 108.17,583.75 183.9,583.75 294.05,473.6 R23.1
NetP2_24: LEDs.24 R24.1 | length 501.7
  Top Layer w20: v1(449,407.75) R24.1@495.67,407.75
  Bottom Layer w20: LEDs.24 222.25,634.8 270.7,586.35 270.7,468.35 331.3,407.75 v1(449,407.75)
NetR?_2: 
P0.00/XL1: Shiftreg.1.14 U1.2 | length 584
  Top Layer w6: Shiftreg.1.14 955.18,1488.57 972,1471.75 972,1246.75 994.47,1224.28 U1.2
P0.01/XL2: Shiftreg.2.14 U1.3 | length 455.2
  Top Layer w6: Shiftreg.2.14 911.55,1028.57 935,1052.02 935,1068.65 970.9,1104.55 1048.8,1104.55 v1@1052,1107.75 ; v1@1079,1200.75 1086.78,1208.53 U1.3
  Bottom Layer w6: v1(1056,1113.75) 1057,1114.75 1057,1177.75 1077,1197.75 v1(1077,1198.75)
P0.02/AIN0: Shiftreg.3.14 U1.4 | length 888.7
  Top Layer w6: Shiftreg.3.14 927.82,568.57 981,621.75 981,1008.98 1031.77,1059.75 1088,1059.75 v1(1100,1071.75) ; v1(1112,1183.75) 1118,1183.75 1127.03,1192.78 U1.4
  Bottom Layer w6: v1(1100,1071.75) 1112,1083.75 v1(1112,1183.75)
P0.03/AIN1: Shiftreg.1.12 Shiftreg.2.12 Shiftreg.3.12 U1.5 | length 1640.1
  Top Layer w6: Shiftreg.3.12 864.83,518.75 v1(924,518.75) ; Shiftreg.2.12 866.11,976.75 v1(916,976.75) ; Shiftreg.1.12 v1(929,1437.39) 933.36,1437.39 960,1410.75 960,1240.75 989.2,1211.55 1035.2,1211.55 1056,1190.75 1056,1190.05 1085.7,1160.35 1123.6,1160.35 1140.28,1177.03 U1.5
  Bottom Layer w6: v1(924,518.75) 944,518.75 954,528.75 954,938.75 v1(916,976.75) 916,1039.75 928.9,1052.65 928.9,1146.85 929,1146.95 v1(929,1437.39)
P0.04/AIN2: Shiftreg.1.11 Shiftreg.2.11 Shiftreg.3.11 U1.6 | length 1469.7
  Top Layer w6: Shiftreg.3.11 963.05,491.8 v1(967,495.75) ; Shiftreg.2.11 920.75,951.8 947,978.05 v1(947,979.75) ; Shiftreg.1.11 920.95,1411.8 948,1384.75 948,1235.75 969,1214.75 v1(969,1185.75) 994.2,1185.75 1031.6,1148.35 1135.6,1148.35 1148.54,1161.28 U1.6
  Bottom Layer w6: v1(967,495.75) 967,959.75 v1(947,979.75) 961.5,994.25 961.5,1033.25 970.9,1042.65 970.9,1146.85 969,1148.75 v1(969,1185.75)
P0.05/AIN3: Shiftreg.1.13 Shiftreg.2.13 Shiftreg.3.13 U1.7 | length 1540.2
  Top Layer w6: v1(784.5,1407.15) 784.5,1421.25 826.23,1462.98 Shiftreg.1.13 ; v1(808,876.75) 808,853.75 793,838.75 793,561.2 811.23,542.98 Shiftreg.3.13 ; v1(813,1324.75) 813,1301.75 797,1285.75 797,1026.75 811.23,1012.52 v1(811.23,1002.98) Shiftreg.2.13 894.33,1002.98 907.7,1016.35 916.3,1016.35 947,1047.05 947,1059.05 980.5,1092.55 1064.8,1092.55 1077.8,1105.55 1115.8,1105.55 1155.79,1145.54 U1.7
  Bottom Layer w6: v1(784.5,1407.15) 784.5,1391.25 813,1362.75 v1(813,1324.75) ; v1(808,876.75) 808,896.75 797.2,907.55 797.2,988.95 v1(811.23,1002.98)
P0.06: Shiftreg.1.10 Shiftreg.2.10 Shiftreg.3.10 U1.8 | length 1576.1
  Top Layer w6: 813.5,926.2 Shiftreg.2.10 866.93,924.75 895,924.75 910,939.75 925.67,939.75 944.67,958.75 955.7,958.75 969,972.05 969,1013.95 1028.8,1073.75 1071,1073.75 1090.8,1093.55 1125.8,1093.55 1162.04,1129.79 U1.8 ; Shiftreg.3.10 822.54,466.2 778,510.75 778,890.75 813.5,926.25 783,956.75 783,1355.75 813.46,1386.2 Shiftreg.1.10
P0.07: LEDs.26 U1.9 | length 1724
  Top Layer w6: LEDs.26 165.45,534.8 325.5,374.75 878,374.75 994,490.75 994,1003.55 1035.2,1044.75 1103,1044.75 1172.29,1114.04 U1.9
P0.08: LEDs.25 U1.10 | length 1824.6
  Top Layer w6: LEDs.25@61.95,534.8 111,485.75 192,485.75 316,361.75 886,361.75 1009,484.75 1009,999.65 1039.1,1029.75 1113,1029.75 1181.54,1098.29 U1.10
P0.09: LEDs.28 U1.11 | length 1694
  Top Layer w6: LEDs.28 192.87,399.05 249.7,399.05 301,347.75 891,347.75 1023,479.75 1023,996.15 1042.6,1015.75 1119,1015.75 1185.8,1082.54 U1.11
P0.10: LEDs.27 U1.12 | length 1800.8
  Top Layer w6: LEDs.27 106.17,385.75 235,385.75 287,333.75 897,333.75 1037,473.75 1037,993.18 1045.57,1001.75 1125,1001.75 1190.05,1066.8 U1.12
P0.11: LEDs.30 U1.14 | length 1710.2
  Top Layer w6: LEDs.30 171.17,320.75 903,320.75 1051,468.75 1051,916.75 1071,936.75 1239.3,936.75 1256.39,953.85 U1.14
P0.12: LEDs.29 U1.15 | length 1847.1
  Top Layer w6: LEDs.29 97.17,294.75 199,294.75 212,307.75 910,307.75 1065,462.75 1065,908.75 1078,921.75 1241.27,921.75 1272.14,952.62 U1.15
P0.13: GPIO.14 U1.16 | length 1646
  Top Layer w6: GPIO.14 434,191.75 536,293.75 915,293.75 1078,456.75 1078,899.75 1086,907.75 1244.24,907.75 1287.89,951.4 U1.16
P0.14: GPIO.13 U1.17 | length 1554.8
  Top Layer w6: GPIO.13 534,181.75 632,279.75 922,279.75 1091,448.75 1091,888.75 1098,895.75 1249.21,895.75 1303.64,950.18 U1.17
P0.15: GPIO.12 U1.18 | length 1466
  Top Layer w6: GPIO.12 634,178.75 723,267.75 929,267.75 1103,441.75 1103,875.75 1110,882.75 1253.18,882.75 1319.39,948.96 U1.18
P0.16: GPIO.11 U1.19 | length 1379.4
  Top Layer w6: GPIO.11 732,58.75 732,174.75 812.2,254.95 936.2,254.95 1116,434.75 1116,862.75 1123,869.75 1257.15,869.75 1335.13,947.73 U1.19
P0.17: 
P0.18: "Debug In.6" U1.21 | length 549.6
  Top Layer w6: U1.21 1366.63,951.02 1384.9,932.75 1402.7,932.75 1415,945.05 1415,960.05 1429,974.05 1429,991.35 1435.3,997.65 1488.5,997.65 1497.4,988.75 1516.7,988.75 1517.2,989.25 1542.7,989.25 1576.1,955.85 1576.1,854.65 1595,835.75 1652.77,835.75
P0.19: 
P0.20: 
P0.21: "Debug In.10" U1.24 | length 534.1
  Top Layer w6: U1.24 1413.87,1022.87 1427,1009.75 v1(1508,1009.75) ; v1(1582,735.75) 1652.77,735.75
  Bottom Layer w6: v1(1508,1009.75) 1571,1009.75 1595,985.75 1595,748.75 v1(1582,735.75)
P0.22: 
P0.23: 
P0.24: 
P0.25: 
P0.26: TP3.1 U1.38 | length 390.8
  Top Layer w6: U1.38 1398.13,1288.62 1383.26,1303.49 1383.26,1415.01 TP3.1@1554.5,1586.25
P0.27: TP2.1 U1.39 | length 362.2
  Top Layer w6: U1.39 1382.38,1287.4 1371.26,1298.52 1371.26,1438.01 1476,1542.75 TP2.1@1476,1586.75
P0.28/AIN4: 
P0.29/AIN5: 
P0.30/AIN6: 
P0.31/AIN7: TP1.1 U1.43 | length 395
  Top Layer w6: v1(1308,1542.75) 1308,1521.75 1321.26,1508.49 1321.26,1324.19 1323,1322.45 1323,1305.05 1319.39,1301.44 U1.43 ; v1(1390,1543.75) TP1.1@1390,1578.75
  Bottom Layer w6: v1(1308,1542.75) v1(1390,1543.75)
Rumble-Drain: Rumblemotor.2 U3.3 | length 139.5
  Top Layer w20: U3.3@1773.08,1697.75 1890,1697.75 Rumblemotor.2
"RumbleGate (G)": U1.37 U3.1 | length 582.6
  Top Layer w6: U1.37 1413.87,1292.87 1396,1310.75 1396,1396.75 1434,1434.75 1590.3,1434.75 1735,1579.45 U3.1
Skiftreg1Q0: R1.2 Shiftreg.1.15 VDD.1 | length 1106.7
  Top Layer w6: VDD.1 405.9,1738.85 593.9,1738.85 623,1709.75 623,1640.75 616.31,1634.06 R1.2
  Top Layer w12: R1.2 593.54,1591.21 v1(613,1571.75) ; v1(856,1571.75) 936,1571.75 952,1555.75 952,1532.75 933.41,1514.16 Shiftreg.1.15
  Bottom Layer w12: v1(613,1571.75) v1(856,1571.75)
Skiftreg1Q1: R2.2 Shiftreg.1.1 VDD.2 | length 714.6
  Top Layer w6: VDD.2 480.1,1764.65 611.1,1764.65 650,1725.75 650,1548.75 641,1539.75 Shiftreg.1.1
  Top Layer w12: R2.2 548,1548.75 557,1539.75 Shiftreg.1.1
Skiftreg1Q2: R3.2 Shiftreg.1.2 VDD.3 | length 791.8
  Top Layer w6: VDD.3 552,1792.75 621,1792.75 676,1737.75 676,1531.75 658.41,1514.16 Shiftreg.1.2
  Top Layer w12: R3.2 510.54,1549.21 545.59,1514.16 Shiftreg.1.2
Skiftreg1Q3: R4.2 Shiftreg.1.3 VDD.4 | length 710.7
  Top Layer w6: VDD.4 542,1910.75 702,1750.75 702,1514.75 675.82,1488.57 Shiftreg.1.3
  Top Layer w12: R4.2 509.08,1503.67 524.18,1488.57 Shiftreg.1.3
Skiftreg1Q4: R5.2 Shiftreg.1.4 VDD.5 | length 761.5
  Top Layer w6: Shiftreg.1.4 683.23,1462.98 728,1507.75 728,1762.75 634,1856.75 VDD.5
  Top Layer w12: R5.2@430,1455.75 507,1455.75 514.23,1462.98 Shiftreg.1.4
Skiftreg1Q5: R6.2 Shiftreg.1.5 VDD.6 | length 731.8
  Top Layer w6: Shiftreg.1.5 694.64,1437.39 753,1495.75 753,1853.25 734,1872.25 VDD.6
  Top Layer w12: R6.2@478.68,1412.21 516.46,1412.21 541.64,1437.39 Shiftreg.1.5
Skiftreg1Q6: R7.2 Shiftreg.1.6 VDD.7 | length 849.4
  Top Layer w6: Shiftreg.1.6 705.05,1411.8 780,1486.75 780,1762.75 834,1816.75 VDD.7
  Top Layer w12: R7.2 506.92,1366.67 552.05,1411.8 Shiftreg.1.6
Skiftreg1Q7: R8.2 Shiftreg.1.7 VDD.8 | length 847
  Top Layer w6: Shiftreg.1.7 716.46,1386.2 806,1475.75 806,1745.75 934,1873.75 VDD.8
  Top Layer w12: R8.2@531,1319.75 531,1352.75 564.46,1386.2 Shiftreg.1.7
Skiftreg2Q0: R9.2 Shiftreg.2.15 | length 446.3
  Top Layer w12: R9.2 589,1136.75 v1(612,1113.75) ; Shiftreg.2.15 892.81,1054.16 905.2,1066.55 905.2,1098.75 890.2,1113.75 v1(866,1113.75)
  Bottom Layer w12: v1(612,1113.75) v1(866,1113.75)
Skiftreg2Q1: R10.2 Shiftreg.2.1 | length 91.7
  Top Layer w12: R10.2 542,1122.79 542,1090.75 553,1079.75 Shiftreg.2.1
Skiftreg2Q2: R11.2 Shiftreg.2.2 | length 186.3
  Top Layer w12: R11.2 505,1092.75 543.59,1054.16 Shiftreg.2.2
Skiftreg2Q3: R12.2 Shiftreg.2.3 | length 122
  Top Layer w12: R12.2 512.54,1047.21 531.18,1028.57 Shiftreg.2.3
Skiftreg2Q4: R13.2 Shiftreg.2.4 | length 167
  Top Layer w12: R13.2@427.99,1002.98 Shiftreg.2.4
Skiftreg2Q5: R14.2 Shiftreg.2.5 | length 122.1
  Top Layer w12: R14.2 518.39,956.14 539.64,977.39 Shiftreg.2.5
Skiftreg2Q6: R15.2 Shiftreg.2.6 | length 187.4
  Top Layer w12: R15.2 500.85,910.6 542.05,951.8 Shiftreg.2.6
Skiftreg2Q7: R16.2 Shiftreg.2.7 | length 121.5
  Top Layer w12: R16.2@535,852.75 535,905.75 555.46,926.2 Shiftreg.2.7
Skiftreg3Q0: R17.2 Shiftreg.3.15 | length 450.1
  Top Layer w12: R17.2 592,678.75 v1(615,655.75) ; Shiftreg.3.15 894.21,594.16 904.8,604.75 904.8,644.35 893.4,655.75 v1@864,655.75
  Bottom Layer w12: v1(615,655.75) 863,655.75 v1(864,654.75)
Skiftreg3Q1: R18.2 Shiftreg.3.1 | length 96
  Top Layer w12: R18.2 546.46,649.29 577,618.75 Shiftreg.3.1@592,618.75
Skiftreg3Q2: R19.2 Shiftreg.3.2 | length 194.8
  Top Layer w12: R19.2 498,655.75 559.59,594.16 Shiftreg.3.2
Skiftreg3Q3: R20.2 Shiftreg.3.3 | length 131.6
  Top Layer w12: R20.2 505.54,610.21 547.18,568.57 Shiftreg.3.3
Skiftreg3Q4: R21.2 Shiftreg.3.4 | length 177.3
  Top Layer w12: R21.2 506.08,564.67 527.77,542.98 Shiftreg.3.4
Skiftreg3Q5: R22.2 Shiftreg.3.5 | length 115
  Top Layer w12: R22.2 480.07,517.75 592.64,517.75 Shiftreg.3.5
Skiftreg3Q6: R23.2 Shiftreg.3.6 | length 174.4
  Top Layer w12: R23.2@426.53,472.75 527,472.75 546.05,491.8 Shiftreg.3.6
Skiftreg3Q7: R24.2 Shiftreg.3.7 | length 105
  Top Layer w12: R24.2@536.05,406.75 536.05,446.79 555.46,466.2 Shiftreg.3.7
SWDCLK: "Debug In.4" U1.25 | length 321.9
  Top Layer w6: U1.25 1454.95,1066.8 1480,1041.75 1507.17,1041.75 1588.1,960.82 1588.1,890.65 1594,884.75 1651.77,884.75
SWDIO: "Debug In.2" U1.26 | length 263.1
  Top Layer w6: U1.26 1457.76,1082.54 1486.56,1053.75 1512.14,1053.75 1600.1,965.79 1600.1,957.65 1615.72,942.03 1646.49,942.03
VDD: 13.1 "Alt. accelerometer.1" "Debug In.1" Accelerometer.9 Accelerometer.10 C5.1 C8.1 C9.1 C12.2 C14.2 GPIO.15 LEDs.32 Rumblemotor.1 SB3.1 Shiftreg.1.16 Shiftreg.2.16 Shiftreg.3.16 SW1.3 U1.13 U1.36 U1.48 VDD.9 VDD.15 | length 7365.9
  Top Layer w6: Accelerometer.9@1364.05,755.06 1392.76,755.06 1396.65,751.17 1396.65,691.82 1389,684.17 1389,645.75 1396.32,638.43 1398.11,638.43 ; Accelerometer.10@1364.05,774.75 C12.2@1417.97,774.75
  Top Layer w9: C9.1@1147.34,1271.52 U1.48@1240.26,1271.52 ; v1(1233.26,960.41) 1240.65,967.8 U1.13
  Top Layer w10: v1(1101,1283.75) C9.1@1134.85,1283.75 ; v1(1289,502.75) 1396.32,610.06 C14.2 1396.32,638.43 ; 1398.11,638.43 13.1 ; v1@1415.26,1328.41 1438.24,1328.44 1437.55,1327.75 C8.1@1443.26,1327.75 ; C12.2@1417.97,774.75 1402,790.72 1402,846.85 1402.9,847.75 1424,847.75 ; U1.36@1443.26,1243.12 C8.1@1443.26,1327.72
  Top Layer w12: v1(817,615.75) v1@821,619.75
  Top Layer w20: v1(743,616.75) v1(743,1177.75) ; v1@819,1063.75 835,1079.75 Shiftreg.2.16 ; v1@821,619.75 Shiftreg.3.16 ; Shiftreg.1.16 v1(921,1539.75) ; VDD.15 1634,1777.75 1660.86,1750.89 1660.86,1681.89 1686,1656.75 1826.43,1656.75 1840.8,1642.38 1840.8,1626.25 1869.3,1597.75 Rumblemotor.1@1906,1597.75 ; SB3.1@1636.16,1713.71 1652.96,1713.71
  Top Layer w25: v1(1174,247.75) 1189,247.75 1288.94,347.69 SW1.3 1289,409.08 v1(1289,502.75) ; v1(1182,777.75) 1235.22,777.75 1305.22,847.75 1424,847.75 1433.48,857.23 1433.48,910.23 1459,935.75 1499.23,935.75
  Bottom Layer w10: v1@1099,1286.41 1375.26,1286.41 v1(1417.26,1328.41)
  Bottom Layer w15: v1@1099,1286.41 1099,1241.48 1177.31,1163.17 1177.31,1013.46 v1@1231.81,958.96
  Bottom Layer w20: v1(742,1063.75) v1(820,1063.75) ; 743,202.75 v1(743,616.75) 744,615.75 v1(817,615.75) ; v1(743,1177.75) 743,1248.75 760,1265.75 837,1265.75 878,1306.75 878,1449.75 921,1492.75 v1(921,1539.75) 921,1679.86 1034,1792.86 1034,1853.75 ; VDD.9 1034,1853.75 ; VDD.15 1634,1903.75 1583,1852.75 1035,1852.75 1034,1853.75
  Bottom Layer w25: LEDs.32 195.17,196.75 304,196.75 334,166.75 334,164.75 ; GPIO.15 334,164.75 ; v1(1174,247.75) 1094.1,247.75 1051.1,204.75 374,204.75 334,164.75 ; v1(1233.26,960.41) 1231.81,958.96 1182,909.15 v1(1182,777.75) 1182,609.75 v1(1289,502.75)
VDD_IO: 
XC1: C1.1 U1.34 X1.1 | length 279.4
  Top Layer w6: U1.34 1459.11,1208.53 1480.15,1229.57 1480.15,1255.88 1505.68,1281.41 1547.26,1281.41 1554.26,1288.41 1554.26,1332.41 1575.94,1354.09 C1.1
XC2: C2.1 U1.35 X1.3 | length 178.3
  Top Layer w6: U1.35 1457.76,1224.28 1468.15,1234.67 1468.15,1260.85 1516.71,1309.41 X1.3@1525.24,1309.41 ; C2.1@1482.26,1314.72 1519.92,1314.72 X1.3@1527.79,1306.85
pads on no net: "Debug In.7" "Debug In.8" D1.4 Shiftreg.1.9 Shiftreg.2.9 Shiftreg.3.9 SW1.1 SW1.4 U1.44

## Polygon pours and split planes (outlines as drawn)
GND on Top Layer "Top_Layer-GND" (solid, remove dead copper, pour order 0): -42.37,2008.87 -42.37,-38.37 2004.87,-38.37 2004.87,2008.87
GND on Bottom Layer "Bottom_Layer-GND" (solid, remove dead copper, pour order 2): -42.37,2008.87 -42.37,-38.37 2004.87,-38.37 2004.87,2008.87

## Keep-outs
Keep-Out Layer:
  circle w6: c95,1873.75 r94.49
  circle w6: c1874,1873.75 r94.49
  circle w6: c1874,94.75 r94.49
  circle w6: c95,93.75 r94.49
  lines w6: 0,0 0,1968.5 1968.5,1968.5 1968.5,0 0,0

## Other copper
Top Layer:
  rectangle net NetC13_2: 1905.4,422.85 1955.4,452.85
  pour cut-out: 1708.65,265.75 1743.32,231.07 1743.32,196.75 1857,196.75 1977.27,196.75 1977.27,1527.76 1708.65,1527.76
  pour cut-out: 1552.26,1090.41 1444.26,1090.41 1444.26,1204.41 1552.26,1204.41
Bottom Layer:
  pour cut-out: 1708.65,265.76 1743.33,231.08 1743.33,197.75 1841.01,197.75 1977.27,197.75 1977.27,1527.76 1708.65,1527.76

## Silkscreen, mask and mechanical layers (free items; w line width, h text height)
Top Overlay:
  lines w10: 8,585.75 205,585.75 ; 9,285.75 205,285.75 ; 385,9.75 385,105.75 ; 783,9.75 783,105.75 ; 986,1862.75 986,1956.75 ; 1188,1862.75 1188,1956.75 ; 1189,1743.75 1189,1841.75 ; 1382,9.75 1382,102.75 ; 1578,1862.75 1578,1956.75 ; 1583,8.75 1583,103.75
  text "Z" at 1465,1926.75 h25
  text "Y" at 1366,1925.75 h25
  text "X" at 1269,1924.75 h25
  text "ST" at 1465,1867.75 h25
  text "8" at 925,1826.35 h25
  text "1" at 227.9,1824.95 h25
  text "Shiftreg.1 parallel out" at 305,1818.75 h27
  text "GND" at 1747.1,1781.15 h27 r90
  text "X" at 1251.2,1704.55 h25 r90
  text "Y" at 1350.6,1700.35 h25 r90
  text "Z" at 1452.8,1700.35 h25 r90
  text "ST" at 1559.2,1686.35 h25 r90
  text "VDD" at 1049.6,1662.55 h27 r90
  text "GND" at 1149,1661.15 h27 r90
  text "1" at 1262.65,784.17 h25
  text "23" at 16,667.75 h25
  text "24" at 102,665.75 h25
  text "2" at 181,552.75 h25
  text "1" at 88,551.75 h25
  text "4" at 176,462.75 h25
  text "3" at 80,459.75 h25
  text "Buttons" at 241.79,366.17 h27 r90
  text "6" at 176,362.75 h25
  text "5" at 78,359.75 h25
  text "GND" at 219.5,247.85 h27
  text "VDD" at 268.5,210.55 h27
  text "ON" at 1199.2,183.45 h27
  text "OFF" at 1520.5,181.25 h27
  text "5V" at 1529.6,126.55 h27
  text "3V" at 1729,126.15 h27
  text "PO.15" at 648,122.35 h27 r90
  text "PO.16" at 745.1,120.55 h27 r90
  text "PO.13" at 445.2,117.15 h27 r90
  text "PO.14" at 545.7,117.15 h27 r90
  text "GND" at 252.7,115.85 h27 r90
  text "VDD" at 350.9,116.35 h27 r90
  text "Int. Accelerometer IO" at 826,114.75 h27
  text "1" at 861,74.75 h25
  text "4" at 1161,74.75 h25
  text "2" at 962,73.75 h25
  text "3" at 1063,73.75 h25
  text "5" at 1261,73.75 h25
  text "6" at 1289,15.75 h25
Bottom Overlay:
  lines w10: 656.5,673.65 656.5,1235.85 722.2,1301.55 1286.2,1301.55 1219,1234.35 ; 657.2,1236.35 1219.4,1236.35 ; 658.1,673.75 1220.3,673.75 1286.3,739.75 1286.3,1301.45 ; 1187,1494.25 1187.1,1494.15 ; 1220.3,673.95 1220.3,1236.15
  text "Designed by: / -Rasmus Espset /  / BachelorTeam: /  - Interactive Cube /    Spring 2016" at 1695.5,379.95 h28
Mechanical 1:
  lines w6: 0,0 0,1968.5 1968.5,1968.5 1968.5,0 0,0

## Dimensions
1968.5,1968.5 to 1968.5,0 on Mechanical 3
0,0 to 1968.5,0 on Mechanical 3

## Text inside footprints (layer, text, board x,y; h text height)
"Debug In": Top Overlay "1" at 1429,920.75 h40
LEDs: Top Overlay "2" at 157,1673.75 h25; Top Overlay "1" at 57,1674.75 h25